# Altium PCB AMS_Slave_Passiv_V2.PcbDoc (part 2 of 2)
Units mm, origin at the board's own origin, x right, y up, seen from the top; angles counter-clockwise.
Board outline 190.4 x 70.05 mm, 4 copper layers (Top Layer, Int1, Int2, Bottom Layer), stack 1.369 mm thick; 116 components, 109 nets, 357 pads, 142 vias.
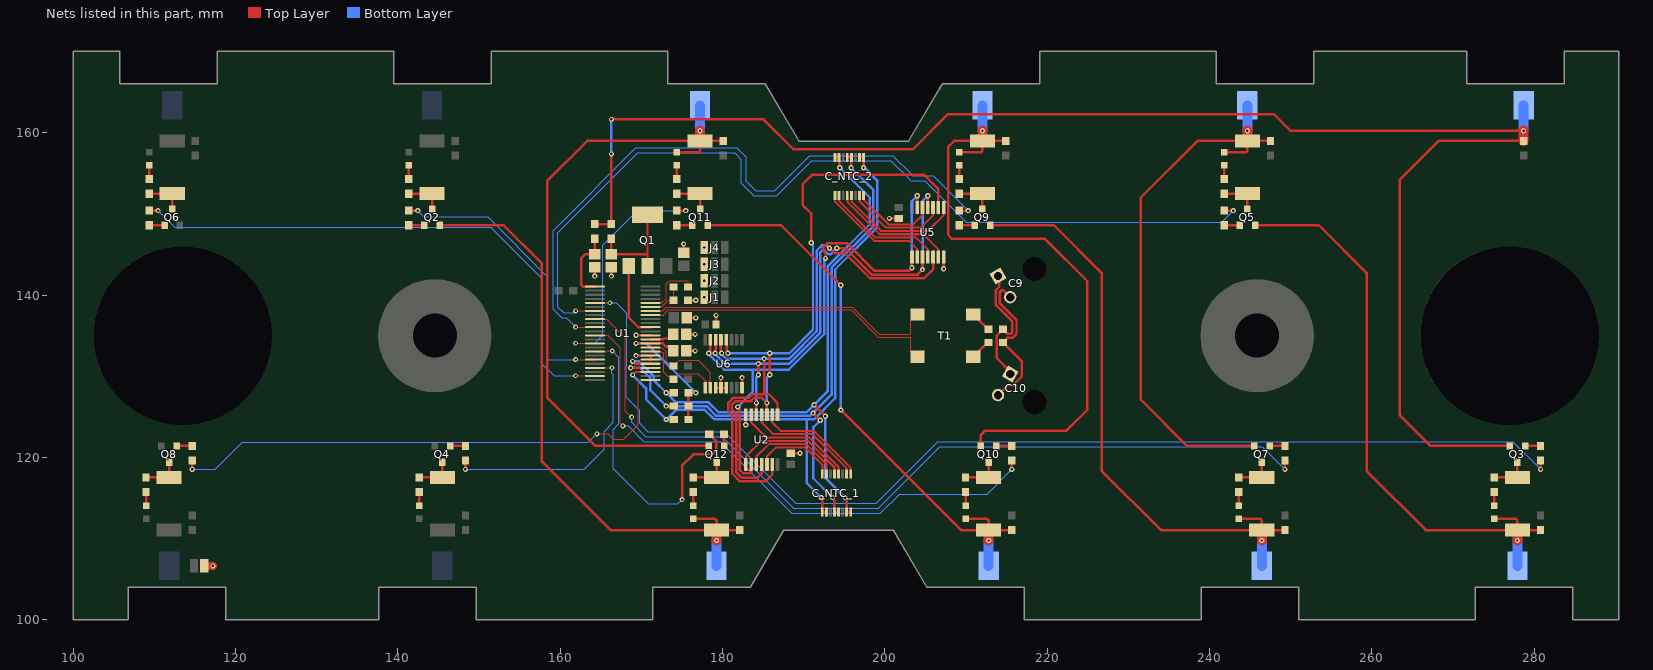
[diagram p4: the nets of this part, all layers, seen from the top]

## Via types
v1: diameter 0.64, hole 0.3, Top Layer to Bottom Layer, tented both sides, 114 vias
v2: diameter 0.61, hole 0.3, Top Layer to Bottom Layer, tented both sides, 28 vias

## Nets (pads, with @x,y where several pads share a name; then routed paths per layer and width w, separated by ;. In a path a pad name is that pad's centre, name@x,y a point inside that pad or via, vN(x,y) a via of type N, cw(c..) or ccw(c..) an arc to the next point about the centre after c; other vN are vias at no path point) (continued)
Cell04+: 11.1 Q2.2 R12.1 R55.1 SC5.1 | length 75.3
  Top Layer w0.305: Q2.2@145.146,148.619 153.006,148.619 157.734,143.891 157.734,119.507 166.192,111.049 R55.1@179.248,111.049 ; 11.1@176.398,112.449 179.064,112.449 179.248,112.265 R55.1@179.248,111.049 ; R12.1@182.098,111.049 R55.1@179.248,111.049
  Top Layer w1.219: v1(179.248,109.779) R55.1@179.248,111.049
  Bottom Layer w1.219: SC5.1@179.248,106.65 v1(179.248,109.779)
Cell05+: 10.1 Q12.2 R51.1 R52.1 SC6.1 | length 81.4
  Top Layer w0.305: 10.1@174.366,157.601 177.032,157.601 177.216,157.785 R51.1@177.216,159.001 ; Q12.2@178.298,121.431 164.319,121.431 158.369,127.381 158.369,154.051 163.319,159.001 R51.1@177.216,159.001 ; R52.1@180.066,159.001 R51.1@177.216,159.001
  Top Layer w1.219: R51.1@177.216,159.001 v1(177.216,160.271)
  Bottom Layer w1.219: v1(177.216,160.271) SC6.1@177.216,163.4
Cell06+: 9.1 Q11.2 R47.1 R48.1 SC7.1 | length 70.6
  Top Layer w0.305: Q11.2@178.166,148.619 187.169,148.619 v1(194.564,141.224) ; v1(194.564,125.857) 209.372,111.049 R47.1@212.776,111.049 ; 9.1@209.926,112.449 212.592,112.449 212.776,112.265 R47.1@212.776,111.049 ; R48.1@215.626,111.049 R47.1@212.776,111.049
  Top Layer w1.219: v1(212.776,109.779) R47.1@212.776,111.049
  Bottom Layer w0.305: v1(194.564,125.857) v1(194.564,141.224)
  Bottom Layer w1.219: SC7.1@212.776,106.65 v1(212.776,109.779)
Cell07+: 8.1 Q10.2 R43.1 R44.1 SC8.1 | length 77.9
  Top Layer w0.305: 8.1@209.164,157.601 211.83,157.601 212.014,157.785 R43.1@212.014,159.001 ; Q10.2@211.826,121.431 211.826,122.799 212.344,123.317 222.377,123.317 224.917,125.857 224.917,141.732 219.71,146.939 208.28,146.939 207.772,147.447 207.772,158.242 208.531,159.001 R43.1@212.014,159.001 ; R44.1@214.864,159.001 R43.1@212.014,159.001
  Top Layer w1.219: R43.1@212.014,159.001 v1(212.014,160.271)
  Bottom Layer w1.219: v1(212.014,160.271) SC8.1@212.014,163.4
Cell08+: 6.1 Q9.2 R39.1 R40.1 SC9.1 | length 74.7
  Top Layer w0.305: Q9.2@212.964,148.619 220.824,148.619 226.695,142.748 226.695,118.364 234.01,111.049 R39.1@246.431,111.049 ; 6.1@243.581,112.449 246.247,112.449 246.431,112.265 R39.1@246.431,111.049 ; R40.1@249.281,111.049 R39.1@246.431,111.049
  Top Layer w1.219: v1(246.431,109.779) R39.1@246.431,111.049
  Bottom Layer w1.219: SC9.1@246.431,106.65 v1(246.431,109.779)
Cell09+: 4.1 Q7.2 R31.1 R32.1 SC10.1 | length 68.6
  Top Layer w0.305: 4.1@241.803,157.601 244.469,157.601 244.653,157.785 R31.1@244.653,159.001 ; Q7.2@245.481,121.431 237.217,121.431 231.521,127.127 231.521,152.019 238.506,159.004 244.65,159.004 R31.1@244.653,159.001 ; R32.1@247.503,159.001 R31.1@244.653,159.001
  Top Layer w1.219: R31.1@244.653,159.001 v1(244.653,160.271)
  Bottom Layer w1.219: v1(244.653,160.271) SC10.1@244.653,163.4
Cell10+: 2.1 Q5.2 R23.1 R24.1 SC11.1 | length 73.6
  Top Layer w0.305: Q5.2@245.603,148.619 253.463,148.619 259.334,142.748 259.334,118.364 266.649,111.049 R23.1@277.927,111.049 ; 2.1@275.077,112.449 277.749,112.449 277.927,112.27 R23.1@277.927,111.049 ; R24.1@280.777,111.049 R23.1@277.927,111.049
  Top Layer w1.219: v1(277.927,109.779) R23.1@277.927,111.049
  Bottom Layer w1.219: SC11.1@277.927,106.65 v1(277.927,109.779)
Cell11+: Q3.2 R7.2 R8.2 R16.1 SC12.1 | length 197.3
  Top Layer w0.305: R8.2@164.244,148.757 R7.2@166.294,148.757 v1(166.294,157.401) ; v2(166.294,161.671) 185.039,161.671 188.722,157.988 203.454,157.988 207.772,162.306 247.904,162.306 249.936,160.274 273.812,160.274 273.815,160.271 v1(278.689,160.271) ; Q3.2@276.977,121.431 267.189,121.431 263.398,125.222 263.398,154.178 268.221,159.001 R16.1@278.689,159.001
  Top Layer w1.219: R16.1@278.689,159.001 v1(278.689,160.271)
  Bottom Layer w0.305: v1(166.294,157.401) v2(166.294,161.671)
  Bottom Layer w1.219: v1(278.689,160.271) SC12.1@278.689,163.4
GND: C1.1 C2.1 C3.1 C4.1 C5.2 C6.2 C7.2 C8.1 C11.2 J1.1 J2.1 J3.1 J4.1 J5.1 R9.2 U1.30 U1.31 U1.36 U2.7 U5.7 U6.3 U6.4 U6.5 U6.8 | length 22.6
  Top Layer w0.305: v1(164.244,142.351) C2.1@164.244,143.456 ; v1(166.294,142.351) C1.1@166.294,143.456 ; v1(169.342,132.556) U1.31@171.116,132.556 U1.30@171.116,132.056 ; v1(169.342,135.056) U1.36@171.116,135.056 ; C11.2@175.195,145.206 v1(175.195,146.311) ; C7.2@175.502,133.139 v1(176.607,133.139) ; C6.2@175.502,135.171 v1(176.607,135.171) ; C5.2@175.578,137.203 v1(176.683,137.203) ; R9.2@175.756,139.37 v1(176.683,139.37) ; U6.3@179.144,128.612 U6.4@179.794,128.612 ; C4.1@179.194,136.369 v1(179.194,137.512) ; v1(179.794,129.848) U6.4@179.794,128.612 ; U6.5@180.444,128.612 U6.4@179.794,128.612 ; U6.8@182.394,128.612 v1(182.394,129.848) ; v1(182.859,124.041) U2.7@182.859,125.272 ; C8.1@188.392,120.522 v1(189.535,120.522) ; v1(200.552,149.455) C3.1@201.695,149.455 ; v1(207.228,143.253) U5.7@207.228,144.705
  Top Layer w1: J5.1@116.135,106.65 v1(117.203,106.65)
  other v1: 177.732,139.725 177.732,141.775 177.732,143.825 177.732,145.876
isoSPI_iso_N: C9.2 C10.2 R2.1 | length 18.9
  Top Layer w0.305: C10.2@213.93,127.691 215.143,128.904 215.796,128.904 216.84,129.948 216.84,131.888 R2.1@214.565,134.163 214.615,134.163 214.913,134.461 214.913,134.557 215.091,134.736 215.732,134.736 216.206,135.21 216.206,136.958 214.171,138.994 214.171,140.41 214.35,140.589 214.602,140.589 C9.2@215.43,139.761
isoSPI_iso_P: C9.1 C10.1 R1.1 | length 16.1
  Top Layer w0.305: C9.1@213.93,142.359 214.086,142.203 214.086,141.039 213.666,140.619 213.666,138.785 215.701,136.749 215.701,135.42 215.523,135.241 215.091,135.241 214.913,135.42 214.913,135.517 214.615,135.814 R1.1@214.565,135.814 213.76,135.009 213.76,132.29 215.43,130.62 C10.1@215.43,130.289
isoSPI_isoR_N: R2.2 T1.1 | length 2.6
  Top Layer w0.305: T1.1@210.871,132.4 212.634,134.163 R2.2@212.765,134.163
isoSPI_isoR_P: R1.2 T1.2 | length 2.6
  Top Layer w0.305: T1.2@210.871,137.63 212.687,135.814 R1.2@212.765,135.814
isoSPIonboard_N: T1.4 U1.41 | length 36.5
  Top Layer w0.152: U1.41@171.116,137.556 172.658,137.556 173.281,138.179 195.831,138.179 198.628,135.382 199.171,134.839 203.113,134.839 203.202,134.75 203.202,133.084 203.886,132.4 T1.4@204.011,132.4
isoSPIonboard_P: T1.3 U1.42 | length 36.5
  Top Layer w0.152: U1.42@171.116,138.056 172.6,138.056 172.771,138.227 ; 172.772,138.227 173.076,138.531 195.977,138.531 199.126,135.382 199.317,135.191 203.113,135.191 203.202,135.28 203.202,136.946 203.886,137.63 T1.3@204.011,137.63
Net1_2: 1.2 R13.2 | length 1.7
  Top Layer w0.305: R13.2@141.346,154.301 1.2@141.346,156.001
Net2_2: 2.2 R18.2 | length 1.7
  Top Layer w0.305: 2.2@275.077,114.049 R18.2@275.077,115.749
Net3_2: 3.2 R19.2 | length 1.7
  Top Layer w0.305: 3.2@142.616,114.049 R19.2@142.616,115.749
Net4_2: 4.2 R26.2 | length 1.7
  Top Layer w0.305: R26.2@241.803,154.301 4.2@241.803,156.001
Net5_2: 5.2 R27.2 | length 1.7
  Top Layer w0.305: R27.2@109.342,154.301 5.2@109.342,156.001
Net6_2: 6.2 R34.2 | length 1.7
  Top Layer w0.305: 6.2@243.581,114.049 R34.2@243.581,115.749
Net7_2: 7.2 R35.2 | length 1.7
  Top Layer w0.305: 7.2@108.961,114.049 R35.2@108.961,115.749
Net8_2: 8.2 R41.2 | length 1.7
  Top Layer w0.305: R41.2@209.164,154.301 8.2@209.164,156.001
Net9_2: 9.2 R45.2 | length 1.7
  Top Layer w0.305: 9.2@209.926,114.049 R45.2@209.926,115.749
Net10_2: 10.2 R49.2 | length 1.7
  Top Layer w0.305: R49.2@174.366,154.301 10.2@174.366,156.001
Net11_2: 11.2 R53.2 | length 1.7
  Top Layer w0.305: 11.2@176.398,114.049 R53.2@176.398,115.749
NetQ1_1: Q1.1 U1.38 | length 9.5
  Top Layer w0.305: Q1.1@168.444,143.606 168.428,143.59 168.428,137.252 169.624,136.056 U1.38@171.116,136.056
NetQ2_1: Q2.1 R15.1 | length 1.9
  Top Layer w0.305: R15.1@141.346,148.619 Q2.1@143.246,148.619
NetQ2_3: Q2.3 R13.1 R14.2 | length 4.7
  Top Layer w0.305: R13.1@141.346,152.501 R14.2@144.196,152.501 Q2.3@144.196,150.619
NetQ3_1: Q3.1 R21.1 | length 1.9
  Top Layer w0.305: Q3.1@278.877,121.431 R21.1@280.777,121.431
NetQ3_3: Q3.3 R18.1 R23.2 | length 4.7
  Top Layer w0.305: R18.1@275.077,117.549 R23.2@277.927,117.549 Q3.3@277.927,119.431
NetQ4_1: Q4.1 R22.1 | length 1.9
  Top Layer w0.305: Q4.1@146.416,121.431 R22.1@148.316,121.431
NetQ4_3: Q4.3 R19.1 R20.2 | length 4.7
  Top Layer w0.305: R19.1@142.616,117.549 R20.2@145.466,117.549 Q4.3@145.466,119.431
NetQ5_1: Q5.1 R29.1 | length 1.9
  Top Layer w0.305: R29.1@241.803,148.619 Q5.1@243.703,148.619
NetQ5_3: Q5.3 R26.1 R31.2 | length 4.7
  Top Layer w0.305: R26.1@241.803,152.501 R31.2@244.653,152.501 Q5.3@244.653,150.619
NetQ6_1: Q6.1 R30.1 | length 1.9
  Top Layer w0.305: R30.1@109.342,148.619 Q6.1@111.242,148.619
NetQ6_3: Q6.3 R27.1 R28.2 | length 4.7
  Top Layer w0.305: R27.1@109.342,152.501 R28.2@112.192,152.501 Q6.3@112.192,150.619
NetQ7_1: Q7.1 R37.1 | length 1.9
  Top Layer w0.305: Q7.1@247.381,121.431 R37.1@249.281,121.431
NetQ7_3: Q7.3 R34.1 R39.2 | length 4.7
  Top Layer w0.305: R34.1@243.581,117.549 R39.2@246.431,117.549 Q7.3@246.431,119.431
NetQ8_1: Q8.1 R38.1 | length 1.9
  Top Layer w0.305: Q8.1@112.761,121.431 R38.1@114.661,121.431
NetQ8_3: Q8.3 R35.1 R36.2 | length 4.7
  Top Layer w0.305: R35.1@108.961,117.549 R36.2@111.811,117.549 Q8.3@111.811,119.431
NetQ9_1: Q9.1 R42.1 | length 1.9
  Top Layer w0.305: R42.1@209.164,148.619 Q9.1@211.064,148.619
NetQ9_3: Q9.3 R41.1 R43.2 | length 4.7
  Top Layer w0.305: R41.1@209.164,152.501 R43.2@212.014,152.501 Q9.3@212.014,150.619
NetQ10_1: Q10.1 R46.1 | length 1.9
  Top Layer w0.305: Q10.1@213.726,121.431 R46.1@215.626,121.431
NetQ10_3: Q10.3 R45.1 R47.2 | length 4.7
  Top Layer w0.305: R45.1@209.926,117.549 R47.2@212.776,117.549 Q10.3@212.776,119.431
NetQ11_1: Q11.1 R50.1 | length 1.9
  Top Layer w0.305: R50.1@174.366,148.619 Q11.1@176.266,148.619
NetQ11_3: Q11.3 R49.1 R51.2 | length 4.7
  Top Layer w0.305: R49.1@174.366,152.501 R51.2@177.216,152.501 Q11.3@177.216,150.619
NetQ12_1: Q12.1 R54.1 | length 1.5
  Top Layer w0.305: R54.1@180.148,122.881 180.148,121.481 Q12.1@180.198,121.431
NetQ12_3: Q12.3 R53.1 R55.2 | length 4.7
  Top Layer w0.305: R53.1@176.398,117.549 R55.2@179.248,117.549 Q12.3@179.248,119.431
NetR6_1: R6.1 U1.44 | length 7.5
  Top Layer w0.152: U1.44@171.116,139.056 172.504,139.056 173.025,139.577 173.025,141.402 173.406,141.783 175.667,141.783 175.756,141.694 R6.1@175.756,141.02
NetR6_2: R6.2 R9.1 U1.43 | length 4.8
  Top Layer w0.152: U1.43@171.116,138.556 172.504,138.556 173.318,139.37 R9.1@173.956,139.37 173.956,139.972 R6.2@173.956,141.02
NTC_IN_1: C_NTC_1.2 C_NTC_1.4 C_NTC_2.2 C_NTC_2.4 R5.1 U1.27 | length 78.9
  Top Layer w0.254: v1(168.91,130.175) 169.291,130.556 U1.27@171.116,130.556
  Top Layer w0.305: v1(173.051,124.688) R5.1@173.978,124.688 ; v1(192.151,115.062) 192.151,114.971 192.278,114.844 C_NTC_1.2@192.278,113.27 ; C_NTC_1.2@192.451,113.27 C_NTC_1.4@192.778,113.27 ; C_NTC_2.4@196.858,156.986 197.171,156.986 C_NTC_2.2@197.185,156.972 ; v1(197.358,155.702) C_NTC_2.2@197.358,156.972
  Bottom Layer w0.305: v1(168.91,130.175) 170.561,128.524 170.561,127.178 v1(173.051,124.688) 174.244,125.881 177.8,125.881 178.992,124.689 190.362,124.689 ; v1(192.151,115.062) 190.362,116.851 190.362,124.689 ; v1(197.358,155.702) 197.358,155.714 197.415,155.772 199.034,154.153 199.034,148.361 193.877,143.204 193.877,127.329 191.237,124.689 190.362,124.689
NTC_IN_2: C_NTC_1.8 C_NTC_1.10 C_NTC_2.8 C_NTC_2.10 R4.1 U1.28 | length 79.9
  Top Layer w0.254: v1(168.656,131.056) U1.28@171.116,131.056
  Top Layer w0.305: v1(173.051,126.338) R4.1@173.978,126.338 ; v1(191.135,125.476) v1(192.024,124.587) ; v1(193.548,115.062) 193.548,114.971 193.778,114.741 C_NTC_1.8@193.778,113.27 ; C_NTC_1.8@193.951,113.27 C_NTC_1.10@194.278,113.27 ; C_NTC_2.10@195.358,156.986 C_NTC_2.8@195.858,156.986 ; v1(195.834,155.702) C_NTC_2.8@195.834,156.962
  Bottom Layer w0.305: v1(168.656,131.056) 169.807,131.056 171.078,129.785 171.078,128.311 v1(173.051,126.338) 177.989,126.338 179.181,125.146 190.797,125.146 191.127,125.476 v1(191.135,125.476) 193.42,127.761 193.42,143.393 198.577,148.55 198.577,152.959 v1(195.834,155.702) ; v1(192.024,124.587) 191.162,123.725 191.162,117.448 v1(193.548,115.062)
NTC_IN_3: C_NTC_1.14 C_NTC_1.16 C_NTC_2.14 C_NTC_2.16 R3.1 U1.29 | length 79.3
  Top Layer w0.254: v1(168.91,131.848) 169.202,131.556 U1.29@171.116,131.556
  Top Layer w0.305: v1(173.051,127.988) R3.1@173.978,127.988 ; v1(191.262,126.492) v1(192.659,125.095) ; C_NTC_2.16@193.858,156.986 194.171,156.986 C_NTC_2.14@194.185,156.972 ; C_NTC_2.14@194.358,156.972 194.358,155.872 194.437,155.793 v1(194.437,155.702) ; v1(195.072,115.062) 195.072,114.971 195.278,114.765 C_NTC_1.14@195.278,113.284 ; C_NTC_1.14@195.451,113.284 195.465,113.27 C_NTC_1.16@195.778,113.27
  Bottom Layer w0.305: v1(168.91,131.848) 169.661,131.848 171.535,129.975 171.535,129.505 v1(173.051,127.988) 174.244,126.795 178.271,126.795 179.463,125.603 190.373,125.603 v1(191.262,126.492) 192.963,128.193 192.963,143.582 198.12,148.739 198.12,152.019 v1(194.437,155.702) ; v1(192.659,125.095) 192.66,125.094 192.66,117.474 v1(195.072,115.062)
NTCsig0: C_NTC_2.1 U5.12 | length 10.4
  Top Layer w0.254: C_NTC_2.1@197.358,152.286 197.406,152.238 197.406,151.754 200.434,148.726 203.501,148.726 204.628,149.853 U5.12@204.628,150.805
NTCsig1: C_NTC_1.1 U2.12 | length 10.3
  Top Layer w0.254: U2.12@185.459,119.172 185.459,120.124 186.586,121.251 190.153,121.251 192.278,119.126 C_NTC_1.1@192.278,117.97
NTCsig2: C_NTC_2.3 U5.10 | length 12.7
  Top Layer w0.254: C_NTC_2.3@196.858,152.286 196.858,151.584 200.121,148.32 204.395,148.32 205.928,149.853 U5.10@205.928,150.805
NTCsig3: C_NTC_1.3 U2.10 | length 12.5
  Top Layer w0.254: U2.10@184.159,119.172 184.159,120.124 185.692,121.657 190.321,121.657 192.778,119.2 C_NTC_1.3@192.778,117.97
NTCsig4: C_NTC_2.7 U5.8 | length 15.3
  Top Layer w0.254: C_NTC_2.7@195.858,152.286 195.858,151.584 199.527,147.914 205.289,147.914 207.228,149.853 U5.8@207.228,150.805
NTCsig5: C_NTC_1.7 U2.8 | length 14.8
  Top Layer w0.254: U2.8@182.859,119.172 182.859,120.124 184.798,122.063 190.489,122.063 193.778,118.774 C_NTC_1.7@193.778,117.97
NTCsig6: C_NTC_2.9 U5.6 | length 15.4
  Top Layer w0.254: C_NTC_2.9@195.358,152.286 195.358,151.509 199.359,147.508 204.727,147.508 206.578,145.658 U5.6@206.578,144.705
NTCsig7: C_NTC_1.9 U2.6 | length 14.9
  Top Layer w0.254: U2.6@183.509,125.272 183.509,124.319 185.36,122.469 190.658,122.469 194.278,118.849 C_NTC_1.9@194.278,117.97
NTCsig8: C_NTC_2.13 U5.4 | length 15
  Top Layer w0.254: C_NTC_2.13@194.358,152.286 194.358,151.584 198.839,147.102 203.833,147.102 205.278,145.658 U5.4@205.278,144.705
NTCsig9: C_NTC_1.13 U2.4 | length 14.5
  Top Layer w0.254: U2.4@184.809,125.272 184.809,124.319 186.254,122.875 191.076,122.875 195.278,118.672 C_NTC_1.13@195.278,117.97
NTCsig10: C_NTC_2.15 U5.2 | length 14.3
  Top Layer w0.254: C_NTC_2.15@193.858,152.286 193.858,151.509 198.671,146.696 202.939,146.696 203.978,145.658 U5.2@203.978,144.705
NTCsig11: C_NTC_1.15 U2.2 | length 13.7
  Top Layer w0.254: U2.2@186.109,125.272 186.109,124.319 187.148,123.281 191.244,123.281 195.778,118.747 C_NTC_1.15@195.778,117.97
S01: R38.2 U1.25 | length 65.8
  Top Layer w0.152: v2(164.496,122.905) 165.851,122.905 166.531,122.226 167.799,122.226 169.62,124.047 169.62,129.438 169.739,129.556 U1.25@171.116,129.556
  Top Layer w0.305: v1(114.661,118.533) R38.2@114.661,119.631
  Bottom Layer w0.152: v1(114.661,118.533) 117.517,118.533 120.839,121.855 146.051,121.855 146.065,121.87 163.46,121.87 v2(164.496,122.905)
S02: R30.2 U1.23 | length 69.5
  Top Layer w0.152: v2(161.894,130.079) 161.9,130.073 162.654,130.073 162.671,130.056 U1.23@164.266,130.056
  Top Layer w0.305: R30.2@109.342,150.419 v1(110.44,150.419)
  Bottom Layer w0.152: v1(110.44,150.419) 112.473,148.386 151.461,148.386 157.734,142.113 157.734,131.572 159.227,130.079 v2(161.894,130.079)
S03: R22.2 U1.21 | length 31.9
  Top Layer w0.152: U1.21@164.266,131.056 165.76,131.056 165.777,131.073 166.361,131.073 v2(166.37,131.064)
  Top Layer w0.305: v1(148.316,118.533) R22.2@148.316,119.631
  Bottom Layer w0.152: v1(148.316,118.533) 162.924,118.533 165.386,120.994 165.386,123.186 166.547,124.347 166.547,130.238 166.37,130.415 v2(166.37,131.064)
S04: R15.2 U1.19 | length 36.5
  Top Layer w0.152: v2@161.9,132.073 162.654,132.073 162.671,132.056 U1.19@164.266,132.056
  Top Layer w0.305: R15.2@141.346,150.419 v1(142.444,150.419)
  Bottom Layer w0.152: v1(142.444,150.419) 143.205,149.658 151.05,149.658 158.343,142.365 158.343,132.233 158.497,132.079 v2(161.894,132.079)
S05: R54.2 U1.17 | length 39.3
  Top Layer w0.152: U1.17@164.266,133.056 165.743,133.056 165.814,133.127 v2(166.401,133.127)
  Top Layer w0.305: v2(175.006,114.808) 175.006,118.999 176.403,120.396 178.689,120.396 179.197,120.904 179.197,122.032 R54.2@178.348,122.881
  Bottom Layer w0.152: v2(166.401,133.127) 167.207,132.32 167.207,124.146 166.497,123.436 166.497,118.618 170.815,114.3 174.498,114.3 v2(175.006,114.808)
S06: R50.2 U1.15 | length 30.3
  Top Layer w0.152: v2@161.9,134.073 162.654,134.073 162.671,134.056 U1.15@164.266,134.056
  Top Layer w0.305: R50.2@174.366,150.419 v1(175.464,150.419)
  Bottom Layer w0.152: v2(161.894,134.079) 164.255,134.079 165.227,135.05 165.227,146.177 169.469,150.419 v1(175.464,150.419)
S07: R46.2 U1.13 | length 69.2
  Top Layer w0.152: U1.13@164.266,135.056 165.844,135.056 167.367,133.534 167.367,124.23 v2(167.706,123.891)
  Top Layer w0.305: v1(215.626,118.533) R46.2@215.626,119.631
  Bottom Layer w0.152: v2(167.706,123.891) 168.353,123.891 170.271,121.972 179.702,121.972 188.532,113.143 199.447,113.143 201.797,115.493 212.587,115.493 v1(215.626,118.533)
S08: R42.2 U1.11 | length 80.7
  Top Layer w0.152: v2@161.9,136.073 162.654,136.073 162.671,136.056 U1.11@164.266,136.056
  Top Layer w0.305: R42.2@209.164,150.419 v1(210.262,150.419)
  Bottom Layer w0.152: v2(161.894,136.079) 160.737,137.236 160.15,137.236 159.107,138.279 159.107,147.952 169.294,158.139 181.734,158.139 182.904,156.969 182.904,154.052 184.099,152.858 186.435,152.858 190.753,157.176 200.986,157.176 203.338,154.824 203.427,154.735 205.946,154.735 v1(210.262,150.419)
S09: R37.2 U1.9 | length 105.7
  Top Layer w0.152: U1.9@164.266,137.056 165.72,137.056 168.021,134.755 168.021,125.73 v2(168.783,124.968)
  Top Layer w0.305: v1(249.281,118.533) R37.2@249.281,119.631
  Bottom Layer w0.152: v2(168.783,124.968) 168.783,124.321 170.523,122.581 179.954,122.581 188.784,113.751 199.194,113.751 206.778,121.335 246.479,121.335 v1(249.281,118.533)
S10: R29.2 U1.7 | length 111.9
  Top Layer w0.152: v2@161.9,138.073 162.654,138.073 162.671,138.056 U1.7@164.266,138.056
  Top Layer w0.305: R29.2@241.803,150.419 v1(242.901,150.419)
  Bottom Layer w0.152: v2(161.894,138.079) 161.66,137.844 160.402,137.844 159.716,138.531 159.716,147.7 169.546,157.53 181.482,157.53 182.295,156.717 182.295,153.8 183.846,152.249 186.687,152.249 191.005,156.567 200.734,156.567 202.907,154.393 202.996,154.304 203.086,154.215 203.175,154.126 204.882,154.126 210.009,148.998 241.48,148.998 v1(242.901,150.419)
S11: R21.2 U1.5 | length 139.5
  Top Layer w0.152: U1.5@164.266,139.056 v2@166.083,139.056
  Top Layer w0.305: v1(280.777,118.533) R21.2@280.777,119.631
  Bottom Layer w0.152: v2(166.099,139.072) 166.92,139.072 168.198,137.794 168.198,131.374 168.108,131.283 168.108,127.421 169.761,125.768 169.761,124.204 170.775,123.19 180.206,123.19 189.036,114.36 198.942,114.36 206.526,121.944 277.366,121.944 v1(280.777,118.533)
SEL0: R11.2 U1.32 U6.1 | length 11
  Top Layer w0.152: U1.32@171.116,133.056 172.504,133.056 172.719,132.841 172.719,130.532 173.239,130.012 173.582,130.012 R11.2@173.956,129.638 174.635,130.317 176.998,130.317 177.844,129.471 U6.1@177.844,128.612
SEL1: R10.2 U1.33 U6.2 | length 11.8
  Top Layer w0.152: U1.33@171.116,133.556 172.504,133.556 173.023,133.036 173.023,131.879 173.239,131.663 173.582,131.663 R10.2@173.956,131.289 174.635,131.967 176.998,131.967 177.723,131.242 178.494,130.472 U6.2@178.494,128.612
SEL_DE_0: U2.9 U5.1 U5.13 U6.15 | length 70
  Top Layer w0.305: v1(178.281,132.842) 178.448,133.01 178.448,134.466 U6.15@178.494,134.512 ; v1(181.864,126.238) 181.864,126.147 182.118,125.893 182.118,118.487 182.537,118.067 183.361,118.067 183.509,118.215 U2.9@183.509,119.172 ; v1(192.674,144.533) 192.674,145.195 192.405,145.463 192.405,145.917 192.908,146.421 195.304,146.421 198.723,143.002 202.946,143.002 v1(203.328,143.384) U5.1@203.328,144.705 ; U5.13@203.978,150.805 v1(203.978,152.257)
  Bottom Layer w0.305: v1(178.281,132.842) 178.281,132.751 180.196,130.836 183.702,130.836 ; v1(181.864,126.238) 183.702,128.076 183.702,130.836 ; v1(192.674,144.533) 192.674,144.443 192.506,144.275 192.506,135.195 188.147,130.836 183.702,130.836 ; v1(203.328,143.384) 203.328,151.607 v1(203.978,152.257)
SEL_DE_1: U2.5 U5.3 U5.11 U6.14 | length 60.3
  Top Layer w0.305: v1(179.073,132.842) 179.144,132.913 U6.14@179.144,134.512 ; U2.5@184.159,125.272 v1(184.159,126.724) ; v1(184.404,130.211) v1(184.404,131.572) ; v1(194.056,145.796) 195.105,145.796 198.356,142.545 204.013,142.545 v1(204.628,143.16) U5.3@204.628,144.705 ; U5.11@205.278,150.805 v1(205.278,152.257)
  Bottom Layer w0.305: v1(179.073,132.842) 179.073,132.751 180.252,131.572 v1(184.404,131.572) 188.237,131.572 192.049,135.384 192.049,145.307 192.282,145.54 192.54,145.54 193.044,145.036 193.296,145.036 v1(194.056,145.796) ; v1(184.159,126.724) 184.159,129.876 184.404,130.121 v1(184.404,130.211) ; v1(204.628,143.16) 204.628,151.607 v1(205.278,152.257)
SEL_DE_2: U2.1 U2.13 U5.5 U6.13 | length 72
  Top Layer w0.305: U6.13@179.794,134.512 179.794,132.913 v1(179.865,132.842) ; v1(185.106,132.197) 185.106,127.872 185.039,127.806 ; U2.13@186.109,119.172 186.109,117.91 185.268,117.069 182.143,117.069 181.204,118.008 181.204,125.247 180.696,125.755 180.696,126.732 181.345,127.381 183.261,127.381 183.686,127.806 185.039,127.806 ; U2.1@186.759,125.272 186.759,126.724 185.678,127.806 185.039,127.806 ; v1(193.167,145.796) 193.792,145.171 194.749,145.171 194.79,145.213 195.042,145.213 198.167,142.088 204.826,142.088 205.928,143.19 U5.5@205.928,144.705
  Bottom Layer w0.305: v1(179.865,132.842) 179.865,132.751 180.419,132.197 v1(185.106,132.197) 188.215,132.197 191.592,135.574 191.592,145.496 192.237,146.141 192.822,146.141 v1(193.167,145.796)
SEL_DE_3: U2.3 U2.11 U5.9 U6.12 | length 78
  Top Layer w0.305: U6.12@180.444,134.512 180.49,134.466 180.49,133.01 v1(180.657,132.842) ; U2.11@184.809,119.172 184.809,118.007 184.328,117.526 182.332,117.526 181.661,118.197 181.661,125.436 181.153,125.944 181.153,126.543 181.534,126.924 183.45,126.924 183.875,127.349 184.835,127.349 v1(185.459,126.724) U2.3@185.459,125.272 ; v1(185.801,130.211) v1(185.801,132.842) ; v1(190.917,146.463) 190.917,150.078 189.865,151.13 189.865,153.67 191.008,154.813 204.851,154.813 205.994,153.67 206.578,153.086 U5.9@206.578,150.805
  Bottom Layer w0.305: v1(180.657,132.842) v1(185.801,132.842) 188.214,132.842 191.135,135.763 191.135,146.155 190.917,146.373 v1(190.917,146.463) ; v1(185.459,126.724) 185.459,129.87 v1(185.801,130.211)
unreg: C1.2 Q1.2 Q1.4 R7.1 | length 12.7
  Top Layer w0.305: R7.1@166.294,146.957 C1.2@166.294,145.056 170.716,145.056 170.744,145.085 ; Q1.2@170.744,143.606 170.744,145.085 ; Q1.4@170.744,149.906 170.744,145.085
V+: C2.2 R8.1 U1.1 | length 8.8
  Top Layer w0.305: R8.1@164.244,146.957 C2.2@164.244,145.056 163.09,145.056 162.61,144.576 162.61,141.276 162.83,141.056 U1.1@164.266,141.056
VREF1: C6.1 U1.35 | length 3
  Top Layer w0.305: U1.35@171.116,134.556 172.632,134.556 172.742,134.666 173.404,134.666 173.902,135.164 C6.1@173.902,135.171
VREF2: C7.1 R3.2 R4.2 R5.2 U1.34 | length 19.1
  Top Layer w0.305: v1(169.342,134.056) U1.34@171.116,134.056 172.624,134.056 173.025,133.655 173.404,133.655 173.902,133.157 C7.1@173.902,133.139 ; R5.2@175.778,124.688 R4.2@175.778,126.338 R3.2@175.778,127.988 v1(176.705,127.988)
  Bottom Layer w0.305: v1(169.342,134.056) 170.637,134.056 v1(176.705,127.988)
pads on no net: C9. C10. C_NTC_1.5 C_NTC_1.6 C_NTC_1.11 C_NTC_1.12 C_NTC_2.5 C_NTC_2.6 C_NTC_2.11 C_NTC_2.12 U1.3 U1.39 U6.7 U6.9 U6.10 U6.11

## Polygon pours and split planes (outlines as drawn)
+5V on Int1 "NONET_L-01_P-001" (solid, remove dead copper, pour order 0): 97.663,175.768 97.663,94.869 302.006,94.869 302.006,175.768
GND on Int2 "NONET_L-01_P-001" (solid, remove dead copper, pour order 1): 97.663,175.768 97.663,94.869 302.006,94.869 302.006,175.768

## Keep-outs
Keep-Out Layer:
  circle w0.254: c144.544,135.015 r12.5
  circle w0.254: c245.854,134.995 r12.5

## Silkscreen, mask and mechanical layers (free items; w line width, h text height)
Top Overlay:
  drawing of 12 lines, arcs and shapes, not listed
  text "'.BoardName': V'.BoardRevision'" at 183.171,128.907 h2
Mechanical 1:
  region: 134.551,103.735 134.563,103.735 134.563,103.71 134.551,103.71 134.551,103.723
  region: 134.587,103.698 134.563,103.698 134.563,103.71 134.587,103.71
  lines w0.2: 100,100 106.767,100 106.767,104 118.767,104 118.767,100 137.63,100 137.63,104 149.63,104 149.63,100 171.404,100 171.404,104 183.404,104 187.541,111.07 201.041,111.07 205.178,104 217.178,104 217.178,100 238.952,100 238.952,104 250.952,104 250.952,100 272.726,100 272.726,104 284.726,104 284.726,100 290.4,100 290.4,170.05 283.663,170.05 283.663,166.05 271.664,166.05 271.664,170.05 252.816,170.05 252.816,166.05 240.816,166.05 240.816,170.05 219.042,170.05 219.042,166.05 207.042,166.05 202.905,158.98 189.405,158.98 185.268,166.05 173.268,166.05 173.268,170.05 151.494,170.05 151.494,166.05 139.494,166.05 139.494,170.05 117.72,170.05 117.72,166.05 105.72,166.05 105.72,170.05 100,170.05 100,100
  lines w3: 208.026,130.048 212.852,125.222 214.757,125.222 218.567,129.032 218.567,141.478 215.138,144.907 211.455,144.907 208.026,141.478 208.026,130.048
Board Outline:
  the board outline again, w0.2

## Text inside footprints (layer, text, board x,y; h text height)
Designator4: Top Overlay "B" at 183.028,145.024 h20 r180